# Altium PCB LED_Driver_brd.PcbDoc
Units mil, origin at the board's own origin, x right, y up, seen from the top; angles counter-clockwise.
Board outline 1575 x 3347 mil, 2 copper layers (Top Layer, Bottom Layer), stack 65.792 mil thick; 16 components, 17 nets, 165 pads, 1255 vias.
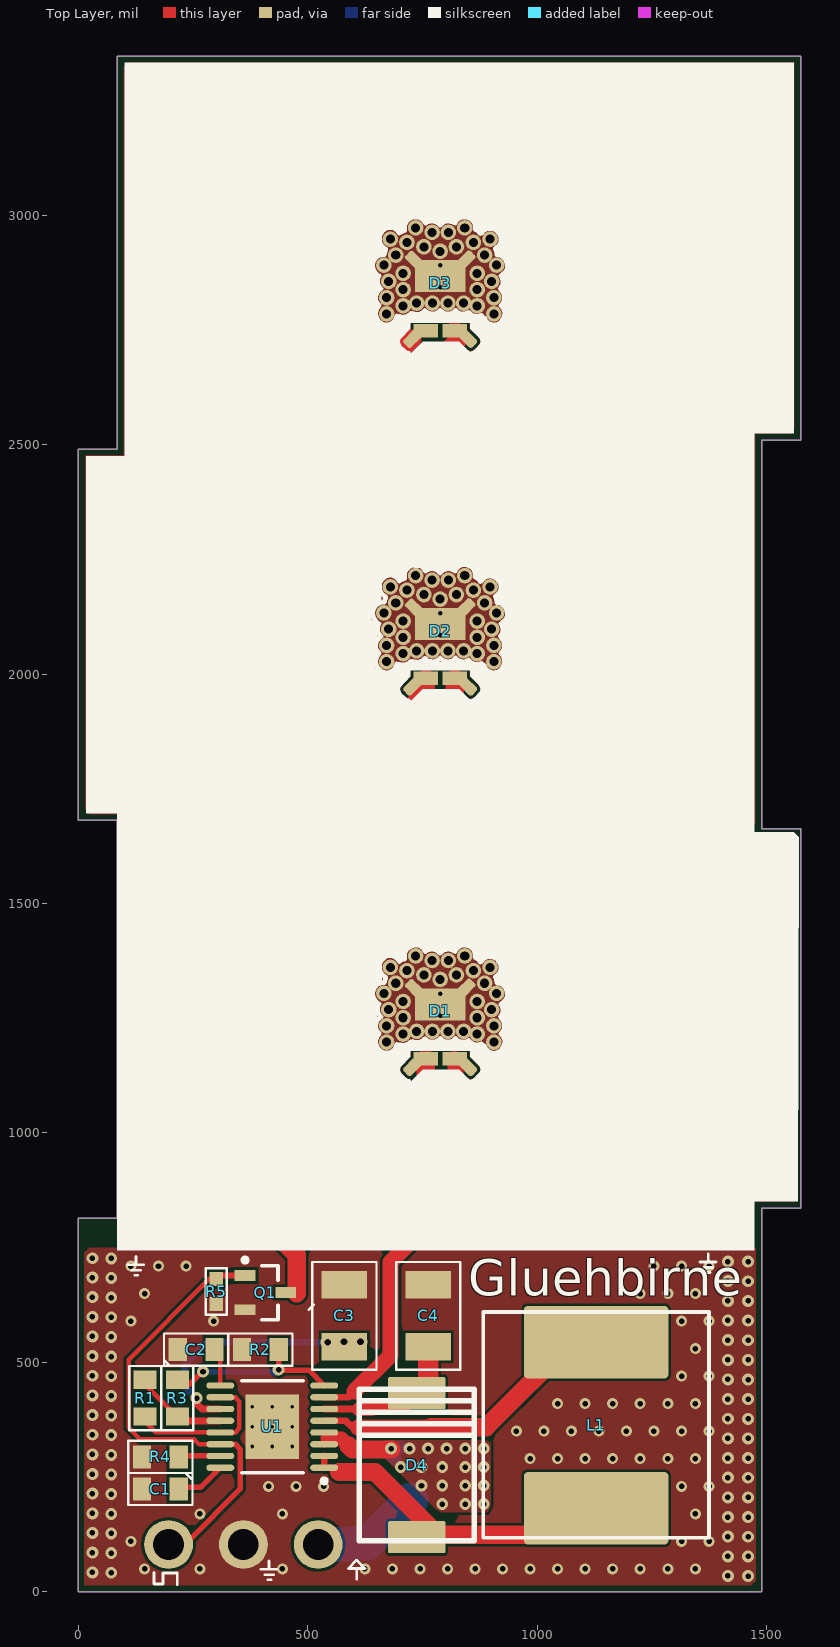
[diagram p0: Top Layer view]
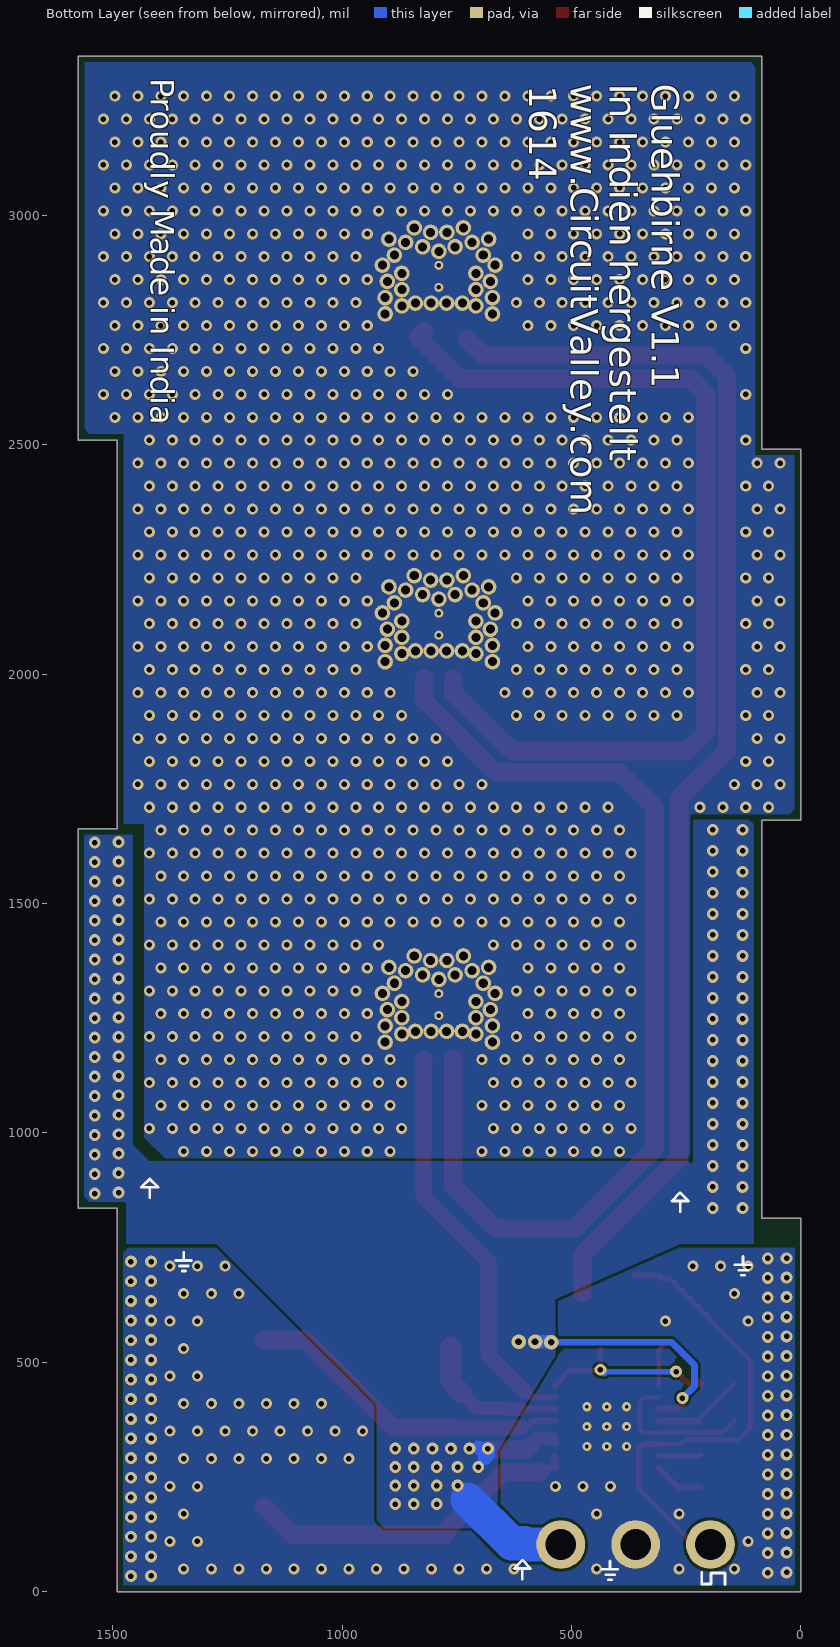
[diagram p1: Bottom Layer view, seen from below]

## Layer stack, top to bottom
Top Solder: solder mask 0.4, Solder Resist, Dk 3.5
Top Layer: signal copper 1.4
Dielectric 1: dielectric 62.9921, FR-4, Dk 4.8
Bottom Layer: signal copper 1.4
Bottom Solder: solder mask 0.4, Solder Resist, Dk 3.5

## Board outline
0,814 85,814 85,1682 0,1682 0,2490 85,2490 85,3347 1575,3347 1575,2510 1490,2510 1490,1663 1575,1663 1575,836 1490,836 1490,0 0,0

## Design rules (kind name [scope] priority, off if disabled: settings)
Clearance [All] p1: gap=6
HoleSize [All] p1: absolutevalues=TRUE maxlimit=500 minlimit=12 maxpercent=80.000 minpercent=20.000
PlaneClearance [All] p1: clearance=0
PlaneConnect [All] p1: planeconnectstyle=Relief reliefexpansion=20 reliefentries=4 reliefconductorwidth=10 reliefairgap=0
PolygonConnect [All] p1: connectstyle=Direct reliefconductorwidth=10 reliefentries=2 polygonreliefangle="90 Angle" airgapwidth=0
RoutingVias [All] p1: holewidth=20 width=50 viastyle="Through Hole" minholewidth=12 minwidth=22 maxholewidth=500 maxwidth=5000
SolderMaskExpansion [All] p1: expansion=4
Width [All] p1: maxlimit=500 minlimit=6 preferedwidth=15
27 further rules are at their usual default settings.

## Components (designator, comment, footprint, x,y, rotation, side; value= is the part's Value field where it differs from the comment)
C1 "1uf" 0805C-TBD 149,224 r0 top
C2 "0.1uf" 0805C-TBD 227,528 r0 top
C3 "22uF" 1210C-GENERIC 580,534 r90 top
C4 "10uf" 1210C-GENERIC 763,534 r90 top
D1 "LUXEON LED" LUXEON 789,1259.84 r270 top
D2 "LUXEON LED" LUXEON 789,2089 r270 top
D3 "LUXEON LED" LUXEON 789,2847 r270 top
D4 "SK3200" SK3200 738,276 r270 top
L1 "10uh" SRR1280A 1129,363 r270 top
Q1 "IRLML6344" SOT-23_N 408,652 r0 top
R1 "46.4K" 0805R-TBD 146,452 r270 top
R2 "26.1K" 0805R-TBD 427,528 r180 top
R3 "34.8K" 0805R-TBD 216,452 r270 top
R4 "68K" 0805R-TBD 209,294 r180 top
R5 "10K" 0603R-10K 301,682 r270 top
U1 "LT3478EFE#TRPBF" LT-FE-16-EPV-BC_N 423,360 r180 top

## Footprints (in the part's own frame and the unit in brackets; to place one, negate y for a bottom-side part, rotate by r counter-clockwise, add the part's x,y. Pads: shape width x height; smd on the part's side, far side on the other; paste and mask are expansions set on the pad)
0603R-10K [mil] "RESISTOR 0603"
  rect 30x30 smd: 1(0,0) 2(55,0)
  silkscreen extent -23,-23 78,23, body extent -4,-15 59,15, height 20
0805C-TBD [mil] "CAPACITOR 0805"
  rect 40x50 smd: 1(-10,0) 2(70,0)
  silkscreen extent -40,-35 100,35, body extent -11,-25 70,25, height 26
0805R-TBD [mil] "RESISTOR 0805 VALUE TO BE DETERMINED"
  rect 40x50 smd: 1(-10,0) 2(70,0)
  silkscreen extent -40,-35 100,35, body extent -11,-25 70,25, height 27
1210C-GENERIC [mil]
  rect 60x100 smd: 1(0,0) 2(135,0)
  silkscreen extent -50,-70 185,70, body extent -10,-50 145,50, height 46
LT-FE-16-EPV-BC_N [mm] "SOP, 16-Leads, Body 5.1x4.5mm, Pitch 0.65mm, Thermal Pad 3.58x2.94mm, IPC Medium Density"
  oval 1.55x0.35 smd: 1(-2.875,2.275) 2(-2.875,1.625) 3(-2.875,0.975) 4(-2.875,0.325) 5(-2.875,-0.325) 6(-2.875,-0.975) 7(-2.875,-1.625) 8(-2.875,-2.275) 9(2.875,-2.275) 10(2.875,-1.625) 11(2.875,-0.975) 12(2.875,-0.325) 13(2.875,0.325) 14(2.875,0.975) 15(2.875,1.625) 16(2.875,2.275)
  rect 2.94x3.58 smd: 17(0,0)
  silkscreen extent -3,-2.55 1.7,3.12, body extent -2.25,-2.55 2.25,2.55, height 1.1
LUXEON [mm]
  round 0.864 hole 0.5: 0(-3.2,1.36) 0(-3.2,-1.36) 0(-2.95,-0.45) 0(-2.95,0.45) 0(-2.57,2.76) 0(-2.57,-2.76) 0(-2.39,1.84) 0(-2.39,-1.84) 0(-2.15,-0.9) 0(-2.15,0.9) 0(-1.9,0) 0(-1.69,2.46) 0(-1.69,-2.46) 0(-1.13,3.12) 0(-1.13,-3.12) 0(-0.68,2.05) 0(-0.68,-2.05) 0(-0.23,2.85) 0(-0.23,-2.85) 0(0.22,2.05) 0(0.22,-2.05) 0(0.67,2.97) 0(0.67,-2.97) 0(0.97,1.3) 0(0.97,-0.43) 0(0.97,0.43) 0(0.97,-1.3) 0(1.12,2.05) 0(1.12,-2.05) 0(1.57,2.97) 0(1.57,-2.97)
  rrect50% 0.6x1 smd rot 45: 0(-1.448,1.448) 2(2.946,-1.549)
  rrect50% 0.6x1 smd rot 135: 0(-1.422,-1.448) 1(2.946,1.549)
  round 0.5 hole 0.25: 0(-1.12,0) 0(0.1,0)
  rect 1.77x2.8 smd: 0(-0.525,0)
  rect 0.75x1.35 smd: 1(2.495,0.8) 2(2.495,-0.8)
  silkscreen extent -3.8,-3.73 2.17,3.72, body extent -1.52,-1.53 2.97,1.52, height 1.92
SK3200 [mil]
  rrect10% 70x125 smd: 1(156.99,0) 2(-156.99,0)
  silkscreen extent -165,-125 165,125, body extent -165,-125 165,125, height 103
SOT-23_N [mm] "SOT23, 3-Leads, Body 2.9x1.3mm, Pitch 0.95mm, Lead Span 2.3mm, IPC Medium Density"
  rect 1.15x0.6 smd: 1(-1.125,0.95) 2(-1.125,-0.95) 3(1.125,0)
  silkscreen extent -1.25,-1.5 0.7,1.92, body extent -0.7,-1.5 0.7,1.5, height 1.11
SRR1280A [mm]
  rrect10% 4x8 smd: 1(-4.6,0) 2(4.6,0)
  silkscreen extent -6.27,-6.25 6.22,6.25, body extent -6.25,-6.3 6.25,6.2, height 7.51

## Part data
C1 C2: library part 0805C-TBD, "CAPACITOR 0805 CERAMIC VALUE TO BE DETERMINED"
C3 C4: library part 1210C-22UF-6V3-X5R-PAN, "GENERIC CAPACITOR NON POLARISED 1210"
D1 D2 D3: library part LMX-PWC2
L1: library part inductor_smd
Q1: library part IRLML2402, "HEXFET Power MOSFET"
R1 R2 R3 R4: library part 0805R-TBD, "RESISTOR 0805 VALUE TO BE DETERMINED"
R5: library part 0603R-10K, "GENERIC RESISTOR 0603"
U1: "4.5 A Monolithic LED Driver with True Color PWM Dimming, 2.8 to 36 V Vin, 42 V Vout MAX, 16-pin SOP (FE-16-EPV-BC), -40 to 125 degC, Pb-Free, Tape and Reel"

## Free pads (board coordinates)
  round 106.3 hole 66.93: 0(197,103) 1(360,103) 2(523,103)

## Via types
v1: diameter 24, hole 12, Top Layer to Bottom Layer, tented both sides, 1078 vias
v2: diameter 26, hole 12, Top Layer to Bottom Layer, 144 vias
v3: diameter 26, hole 12, Top Layer to Bottom Layer, tented both sides, 21 vias
v4: diameter 19.68, hole 7.87, Top Layer to Bottom Layer, 9 vias
v5: diameter 32, hole 15, Top Layer to Bottom Layer, tented bottom, 3 vias

## Nets (pads, with @x,y where several pads share a name; then routed paths per layer and width w, separated by ;. In a path a pad name is that pad's centre, name@x,y a point inside that pad or via, vN(x,y) a via of type N, cw(c..) or ccw(c..) an arc to the next point about the centre after c; other vN are vias at no path point)
GND: C1.1 C2.1 C3.2 C4.2 pad.1 Q1.2 R2.2 R4.2 R5.2 U1.17
  other v1: 145,50 265,50 445,50 625,50 685,50 745,50 805,50 865,50 925,50 985,50 1045,50 1105,50 1165,50 1225,50 1285,50 1345,50 115,110 1315,110 1375,110 265,170 445,170 1345,170 415,230 475,230 535,230 1315,230 1375,230 985,290 1045,290 1105,290 1165,290 1225,290 1285,290 1345,290 955,350 1015,350 1075,350 1135,350 1195,350 1255,350 1315,350 1375,350 1045,410 1105,410 1165,410 1225,410 1285,410 1345,410 1315,470 1375,470 1345,530 115,590 295,590 1315,590 1375,590 145,650 1225,650 1285,650 1345,650 115,710 175,710 235,710 1255,710 1315,710 1375,710
  other v2: 1460,34 1416,34.5 72,41.5 31,42.5 1416,77.33 1460,77.17 72,84.33 31,85.33 1416,120.17 1460,120 72,127.17 31,128.17 1416,163 1460,162.83 72,170 31,171 1416,205.83 1460,205.67 72,212.83 31,213.83 1460,248.5 1416,248.67 72,255.67 31,256.67 1460,291.33 1416,291.5 72,298.5 31,299.5 1416,334.33 1460,334.17 72,341.33 31,342.33 1416,377.17 1460,377 72,384.17 31,385.17 1416,420 1460,419.83 72,427 31,428 1416,462.83 1460,462.67 72,469.83 31,470.83 1460,505.5 1416,505.67 72,512.67 31,513.67 1416,548.5 1460,548.33 72,555.5 31,556.5 1416,591.33 1460,591.17 72,598.33 31,599.33 1416,634.17 1460,634 72,641.17 31,642.17 1416,677 1460,676.83 72,684 31,685 1416,719.83 1460,719.66 31,727 72,726.83
  other v4: 379.69,316.69 423,316.69 466.31,316.69 379.69,360 423,360 466.31,360 379.69,403.31 423,403.31 466.31,403.31
L: L1.1 U1.5 | length 719.1
  Top Layer w15: U1.5 582.2,372.8 593,362 606,362 610,358
  Top Layer w35: 610,358 768,358 769,359
  Top Layer w40: 769,359 889,359 1079.1,549.1 L1.1@1170,549.1
NetC1_2: C1.2 U1.16 | length 108.4
  Top Layer w12: C1.2@219,228 267.38,228 U1.16
NetC2_2: C2.2 U1.9 | length 97.2
  Top Layer w10: C2.2@296,541 309.81,527.19 U1.9
NetC4_1: C4.1 D4.2 U1.6 | length 327.8
  Top Layer w15: U1.6 610.61,398.39 611,398
  Top Layer w30: 611,398 640,398 642,400 705.01,400 D4.2
  Top Layer w45: D4.2 763,457.99 C4.1
NetD1_0: D1.0 D2.0 D3.0
  other v1: 395,960 445,960 495,960 545,960 595,960 645,960 695,960 895,960 945,960 995,960 1045,960 1095,960 1145,960 1195,960 1245,960 1295,960 1345,960 370,1010 420,1010 470,1010 520,1010 570,1010 620,1010 670,1010 870,1010 920,1010 970,1010 1020,1010 1070,1010 1120,1010 1170,1010 1220,1010 1270,1010 1320,1010 1370,1010 1420,1010 395,1060 445,1060 495,1060 545,1060 595,1060 645,1060 695,1060 895,1060 945,1060 995,1060 1045,1060 1095,1060 1145,1060 1195,1060 1245,1060 1295,1060 1345,1060 1395,1060 370,1110 420,1110 470,1110 520,1110 570,1110 620,1110 670,1110 870,1110 920,1110 970,1110 1020,1110 1070,1110 1120,1110 1170,1110 1220,1110 1270,1110 1320,1110 1370,1110 1420,1110 395,1160 445,1160 495,1160 545,1160 595,1160 645,1160 695,1160 895,1160 945,1160 995,1160 1045,1160 1095,1160 1145,1160 1195,1160 1245,1160 1295,1160 1345,1160 1395,1160 370,1210 420,1210 470,1210 520,1210 570,1210 620,1210 970,1210 1020,1210 1070,1210 1120,1210 1170,1210 1220,1210 1270,1210 1320,1210 1370,1210 1420,1210 395,1260 445,1260 495,1260 545,1260 595,1260 945,1260 995,1260 1045,1260 1095,1260 1145,1260 1195,1260 1245,1260 1295,1260 1345,1260 1395,1260 370,1310 420,1310 470,1310 520,1310 570,1310 620,1310 970,1310 1020,1310 1070,1310 1120,1310 1170,1310 1220,1310 1270,1310 1320,1310 1370,1310 1420,1310 395,1360 445,1360 495,1360 545,1360 595,1360 945,1360 995,1360 1045,1360 1095,1360 1145,1360 1195,1360 1245,1360 1295,1360 1345,1360 1395,1360 370,1410 420,1410 470,1410 520,1410 570,1410 620,1410 670,1410 920,1410 970,1410 1020,1410 1070,1410 1120,1410 1170,1410 1220,1410 1270,1410 1320,1410 1370,1410 1420,1410 395,1460 445,1460 495,1460 545,1460 595,1460 645,1460 695,1460 745,1460 795,1460 845,1460 895,1460 945,1460 995,1460 1045,1460 1095,1460 1145,1460 1195,1460 1245,1460 1295,1460 1345,1460 1395,1460 370,1510 420,1510 470,1510 520,1510 570,1510 620,1510 670,1510 720,1510 770,1510 820,1510 870,1510 920,1510 970,1510 1020,1510 1070,1510 1120,1510 1170,1510 1220,1510 1270,1510 1320,1510 1370,1510 1420,1510 395,1560 445,1560 495,1560 545,1560 595,1560 645,1560 695,1560 745,1560 795,1560 845,1560 895,1560 945,1560 995,1560 1045,1560 1095,1560 1145,1560 1195,1560 1245,1560 1295,1560 1345,1560 1395,1560 370,1610 420,1610 470,1610 520,1610 570,1610 620,1610 670,1610 720,1610 770,1610 820,1610 870,1610 920,1610 970,1610 1020,1610 1070,1610 1120,1610 1170,1610 1220,1610 1270,1610 1320,1610 1370,1610 1420,1610 395,1660 445,1660 495,1660 545,1660 595,1660 645,1660 695,1660 745,1660 795,1660 845,1660 895,1660 945,1660 995,1660 1045,1660 1095,1660 1145,1660 1195,1660 1245,1660 1295,1660 1345,1660 1395,1660 70,1710 120,1710 170,1710 220,1710 420,1710 470,1710 520,1710 570,1710 620,1710 670,1710 720,1710 770,1710 820,1710 870,1710 920,1710 970,1710 1020,1710 1070,1710 1120,1710 1170,1710 1220,1710 1270,1710 1320,1710 1370,1710 1420,1710 45,1760 95,1760 145,1760 695,1760 745,1760 795,1760 845,1760 895,1760 945,1760 995,1760 1045,1760 1095,1760 1145,1760 1195,1760 1245,1760 1295,1760 1345,1760 1395,1760 1445,1760 70,1810 120,1810 770,1810 820,1810 870,1810 920,1810 970,1810 1020,1810 1070,1810 1120,1810 1170,1810 1220,1810 1270,1810 1320,1810 1370,1810 1420,1810 45,1860 95,1860 795,1860 845,1860 895,1860 945,1860 995,1860 1045,1860 1095,1860 1145,1860 1195,1860 1245,1860 1295,1860 1345,1860 1395,1860 1445,1860 70,1910 120,1910 270,1910 320,1910 370,1910 420,1910 470,1910 520,1910 570,1910 620,1910 870,1910 920,1910 970,1910 1020,1910 1070,1910 1120,1910 1170,1910 1220,1910 1270,1910 1320,1910 1370,1910 1420,1910 45,1960 95,1960 245,1960 295,1960 345,1960 395,1960 445,1960 495,1960 545,1960 595,1960 645,1960 895,1960 945,1960 995,1960 1045,1960 1095,1960 1145,1960 1195,1960 1245,1960 1295,1960 1345,1960 1395,1960 1445,1960 70,2010 120,2010 270,2010 320,2010 370,2010 420,2010 470,2010 520,2010 570,2010 620,2010 970,2010 1020,2010 1070,2010 1120,2010 1170,2010 1220,2010 1270,2010 1320,2010 1370,2010 1420,2010 45,2060 95,2060 245,2060 295,2060 345,2060 395,2060 445,2060 495,2060 545,2060 595,2060 945,2060 995,2060 1045,2060 1095,2060 1145,2060 1195,2060 1245,2060 1295,2060 1345,2060 1395,2060 1445,2060 70,2110 120,2110 270,2110 320,2110 370,2110 420,2110 470,2110 520,2110 570,2110 620,2110 970,2110 1020,2110 1070,2110 1120,2110 1170,2110 1220,2110 1270,2110 1320,2110 1370,2110 1420,2110 45,2160 95,2160 245,2160 295,2160 345,2160 395,2160 445,2160 495,2160 545,2160 595,2160 945,2160 995,2160 1045,2160 1095,2160 1145,2160 1195,2160 1245,2160 1295,2160 1345,2160 1395,2160 1445,2160 70,2210 120,2210 270,2210 320,2210 370,2210 420,2210 470,2210 520,2210 570,2210 620,2210 970,2210 1020,2210 1070,2210 1120,2210 1170,2210 1220,2210 1270,2210 1320,2210 1370,2210 1420,2210 45,2260 95,2260 245,2260 295,2260 345,2260 395,2260 445,2260 495,2260 545,2260 595,2260 645,2260 695,2260 745,2260 795,2260 845,2260 895,2260 945,2260 995,2260 1045,2260 1095,2260 1145,2260 1195,2260 1245,2260 1295,2260 1345,2260 1395,2260 1445,2260 70,2310 120,2310 270,2310 320,2310 370,2310 420,2310 470,2310 520,2310 570,2310 620,2310 670,2310 720,2310 770,2310 820,2310 870,2310 920,2310 970,2310 1020,2310 1070,2310 1120,2310 1170,2310 1220,2310 1270,2310 1320,2310 1370,2310 1420,2310 45,2360 95,2360 245,2360 295,2360 345,2360 395,2360 445,2360 495,2360 545,2360 595,2360 645,2360 695,2360 745,2360 795,2360 845,2360 895,2360 945,2360 995,2360 1045,2360 1095,2360 1145,2360 1195,2360 1245,2360 1295,2360 1345,2360 1395,2360 1445,2360 70,2410 120,2410 270,2410 320,2410 370,2410 420,2410 470,2410 520,2410 570,2410 620,2410 670,2410 720,2410 770,2410 820,2410 870,2410 920,2410 970,2410 1020,2410 1070,2410 1120,2410 1170,2410 1220,2410 1270,2410 1320,2410 1370,2410 1420,2410 45,2460 95,2460 245,2460 295,2460 345,2460 395,2460 445,2460 495,2460 545,2460 595,2460 645,2460 695,2460 745,2460 795,2460 845,2460 895,2460 945,2460 995,2460 1045,2460 1095,2460 1145,2460 1195,2460 1245,2460 1295,2460 1345,2460 1395,2460 1445,2460 120,2510 270,2510 320,2510 370,2510 420,2510 470,2510 520,2510 570,2510 620,2510 670,2510 720,2510 770,2510 820,2510 870,2510 920,2510 970,2510 1020,2510 1070,2510 1120,2510 1170,2510 1220,2510 1270,2510 1320,2510 1370,2510 1420,2510 245,2560 295,2560 345,2560 395,2560 445,2560 495,2560 545,2560 595,2560 645,2560 695,2560 745,2560 795,2560 845,2560 895,2560 945,2560 995,2560 1045,2560 1095,2560 1145,2560 1195,2560 1245,2560 1295,2560 1345,2560 1395,2560 1445,2560 1495,2560 120,2610 770,2610 820,2610 870,2610 920,2610 970,2610 1020,2610 1070,2610 1120,2610 1170,2610 1220,2610 1270,2610 1320,2610 1370,2610 1420,2610 1470,2610 1520,2610 845,2660 895,2660 945,2660 995,2660 1045,2660 1095,2660 1145,2660 1195,2660 1245,2660 1295,2660 1345,2660 1395,2660 1445,2660 1495,2660 120,2710 920,2710 970,2710 1020,2710 1070,2710 1120,2710 1170,2710 1220,2710 1270,2710 1320,2710 1370,2710 1420,2710 1470,2710 1520,2710 145,2760 195,2760 245,2760 295,2760 345,2760 395,2760 445,2760 495,2760 545,2760 595,2760 945,2760 995,2760 1045,2760 1095,2760 1145,2760 1195,2760 1245,2760 1295,2760 1345,2760 1395,2760 1445,2760 1495,2760 120,2810 170,2810 220,2810 270,2810 320,2810 370,2810 420,2810 470,2810 520,2810 570,2810 620,2810 970,2810 1020,2810 1070,2810 1120,2810 1170,2810 1220,2810 1270,2810 1320,2810 1370,2810 1420,2810 1470,2810 1520,2810 145,2860 195,2860 245,2860 295,2860 345,2860 395,2860 445,2860 495,2860 545,2860 595,2860 945,2860 995,2860 1045,2860 1095,2860 1145,2860 1195,2860 1245,2860 1295,2860 1345,2860 1395,2860 1445,2860 1495,2860 120,2910 170,2910 220,2910 270,2910 320,2910 370,2910 420,2910 470,2910 520,2910 570,2910 620,2910 970,2910 1020,2910 1070,2910 1120,2910 1170,2910 1220,2910 1270,2910 1320,2910 1370,2910 1420,2910 1470,2910 1520,2910 145,2960 195,2960 245,2960 295,2960 345,2960 395,2960 445,2960 495,2960 545,2960 595,2960 945,2960 995,2960 1045,2960 1095,2960 1145,2960 1195,2960 1245,2960 1295,2960 1345,2960 1395,2960 1445,2960 1495,2960 120,3010 170,3010 220,3010 270,3010 320,3010 370,3010 420,3010 470,3010 520,3010 570,3010 620,3010 670,3010 720,3010 770,3010 820,3010 870,3010 920,3010 970,3010 1020,3010 1070,3010 1120,3010 1170,3010 1220,3010 1270,3010 1320,3010 1370,3010 1420,3010 1470,3010 1520,3010 145,3060 195,3060 245,3060 295,3060 345,3060 395,3060 445,3060 495,3060 545,3060 595,3060 645,3060 695,3060 745,3060 795,3060 845,3060 895,3060 945,3060 995,3060 1045,3060 1095,3060 1145,3060 1195,3060 1245,3060 1295,3060 1345,3060 1395,3060 1445,3060 1495,3060 120,3110 170,3110 220,3110 270,3110 320,3110 370,3110 420,3110 470,3110 520,3110 570,3110 620,3110 670,3110 720,3110 770,3110 820,3110 870,3110 920,3110 970,3110 1020,3110 1070,3110 1120,3110 1170,3110 1220,3110 1270,3110 1320,3110 1370,3110 1420,3110 1470,3110 1520,3110 145,3160 195,3160 245,3160 295,3160 345,3160 395,3160 445,3160 495,3160 545,3160 595,3160 645,3160 695,3160 745,3160 795,3160 845,3160 895,3160 945,3160 995,3160 1045,3160 1095,3160 1145,3160 1195,3160 1245,3160 1295,3160 1345,3160 1395,3160 1445,3160 1495,3160 120,3210 170,3210 220,3210 270,3210 320,3210 370,3210 420,3210 470,3210 520,3210 570,3210 620,3210 670,3210 720,3210 770,3210 820,3210 870,3210 920,3210 970,3210 1020,3210 1070,3210 1120,3210 1170,3210 1220,3210 1270,3210 1320,3210 1370,3210 1420,3210 1470,3210 1520,3210 145,3260 195,3260 245,3260 295,3260 345,3260 395,3260 445,3260 495,3260 545,3260 595,3260 645,3260 695,3260 745,3260 795,3260 845,3260 895,3260 945,3260 995,3260 1045,3260 1095,3260 1145,3260 1195,3260 1245,3260 1295,3260 1345,3260 1395,3260 1445,3260 1495,3260
NetD1_1: D1.1 U1.7 | length 888.4
  Top Layer w15: U1.7 588.98,423.98 602,437
  Top Layer w35: 602,437 681,516 681,719 822,860 822,1156 823,1157 823,1159.11 D1.1@820.5,1161.61
NetD1_2: D1.2 D2.1 | length 2217.5
  Top Layer w40: D1.2@757.5,1161.61 757.5,884.5 664,791 493,791 319,965 319,1710 395,1786 664,1786 820.5,1942.5 D2.1@820.5,1990.77
NetD2_2: D2.2 D3.1 | length 2086
  Top Layer w40: D2.2@757.5,1990.77 757.5,1960.5 629,1832 249,1832 207,1874 207,2611 240,2644 742.73,2644 834,2735.27 D3.1@820.5,2748.77
NetD3_2: D3.2 Q1.3 | length 2730.1
  Top Layer w40: 476.29,651 476.29,733.71 265,945 265,1730 161,1834 161,2650 206,2695 692,2695 D3.2@728,2731
NetR1_1: R1.1 R3.2 U1.12 | length 198.8
  Top Layer w10: R1.1@145,452 223.29,373.71 cw(c221.59,372) R3.2@224,372
  Top Layer w15: R3.2@224,372 309.02,372 U1.12
NetR1_2: R1.2 U1.10 U1.13 | length 324.8
  Top Layer w10: R1.2@145,372 169,348 309.02,348 U1.13 310.02,347 342,347 351.32,356.32 351.32,414.68 343,423 343,423.98 U1.10
NetR2_1: R2.1 R3.1 U1.8 | length 407.2
  Top Layer w12: R3.1@224,460 216,452 243,452 271,480 v3(272,480) ; R2.1 v3(437,484) 438,483 502.76,483 U1.8
  Bottom Layer w12: v3(272,480) 423,480 428,475 v3(437,484)
NetR4_1: R4.1 U1.15 | length 91.6
  Top Layer w12: R4.1@219,298 220.98,296.02 U1.15
PWM: pad.0 Q1.1 R5.1 U1.14 | length 1033.7
  Top Layer w10: R5.1 286,682 110,506 110,357.44 135.44,332 253,332 263.39,321.61 U1.14
  Top Layer w12: pad.0 204,110 239,110 353.13,224.13 353.13,310.87 342.39,321.61 U1.14 ; R5.1 308.4,689.4 Q1.1
SW: D4.1 L1.2 U1.1 U1.2 | length 752
  Top Layer w15: U1.2 U1.1 559.81,270.43 569.1,261.14
  Top Layer w40: 569.1,261.14 646.86,261.14 774,134 774,124.01 1107.11,124.01 L1.2@1170,186.9
VIN: C3.1 pad.2 U1.3 U1.4 U1.11 | length 965.7
  Top Layer w15: v3(258,422) 258,410 269.61,398.39 U1.11 ; U1.3 543,328.43 543,334
  Top Layer w30: 543,334 574,334 590,318
  Top Layer w40: 590,318 598,310 v3@682,310
  Bottom Layer w15: v3(258,422) 232,448 232,494 282,544 v5(544,544)
  Bottom Layer w30: v5(544,544) 545,545 v5(579,545) ; v3(682,312) 682,298.21 688.36,291.85 ; v3@688.36,312 699.81,312 702.81,315
  Bottom Layer w75: pad.2 599.51,103 602.01,105.5 630.5,105.5 726,201
  other v2: 127,836.5 192,836.5 1539,868 1487,870 127,882.31 192,882.31 1539,910.5 1487,912.44 127,928.11 192,928.11 1539,953 1487,954.89 127,973.92 192,973.92 1539,995.5 1487,997.33 127,1019.72 192,1019.72 1539,1038 1487,1039.78 127,1065.53 192,1065.53 1539,1080.5 1487,1082.22 127,1111.33 192,1111.33 1539,1123 1487,1124.67 127,1157.14 192,1157.14 1539,1165.5 1487,1167.11 127,1202.94 192,1202.94 1539,1208 1487,1209.55 127,1248.75 192,1248.75 1539,1250.5 1487,1252 1539,1293 1487,1294.44 127,1294.56 192,1294.56 1539,1335.5 1487,1336.89 127,1340.36 192,1340.36 1539,1378 1487,1379.33 127,1386.17 192,1386.17 1539,1420.5 1487,1421.78 127,1431.97 192,1431.97 1539,1463 1487,1464.22 127,1477.78 192,1477.78 1539,1505.5 1487,1506.66 127,1523.58 192,1523.58 1539,1548 1487,1549.11 127,1569.39 192,1569.39 1539,1590.5 1487,1591.55 127,1615.19 192,1615.19 1539,1633 1487,1634 127,1661 192,1661
  other v3: 793.5,191 843.6,191 884,191 748.25,231.33 793.5,231.33 843.6,231.33 884,231.33 703,271.67 748.25,271.67 793.5,271.67 843.6,271.67 884,271.67 722.4,312 762.8,312 803.2,312 843.6,312 884,312
  other v5: 615,545

## Polygon pours and split planes (outlines as drawn)
NetD1_0 on Top Layer "Top Layer-No Net" (solid, remove dead copper, pour order 36): 99,3334 1561,3334 1561,2524 1476,2524 1476,1674 1450,1674 1450,977.15 1323.42,850.58 1230.85,758 1032.42,758 415,758 286,887 241,932 241,1695 15,1695 15,2477 99,2477
GND on Top Layer "Top Layer-No Net" (solid, remove dead copper, pour order 32): 13,750 13,14 1477,14 1477,750
VIN on Top Layer "Top Layer-No Net" (solid, pour order 33): 668,330 884.51,330 cw(c884.51,309.51) 899,324 899,191.42 cw(c873.1,191.42) 891.41,173.1 795.65,173.1 cw(c795.65,196.65) 779,180 668,291 668,330
VIN on Top Layer "Top Layer-No Net" (solid, pour order 38): 103,1683 235,1683 235,938 415,758 103,758
VIN on Top Layer "Top Layer-No Net" (solid, pour order 40): 1562,1650 1456,1650 1456,974 1343,861 1326,844 1241,759 1470,759 1470,844 1470,850 1562,850
VIN on Bottom Layer "Top Layer-No Net" (solid, pour order 34): 663,330 891,330 898,323 898,179 893,174 785,174 776,183 663,296 663,326
VIN on Bottom Layer "Top Layer-No Net" (solid, pour order 39): 1562,1650 1456,1650 1456,974 1343,861 1326,844 1133,844 1123,844 1038,759 1470,759 1470,844 1469,845 1474,850 1562,850
VIN on Bottom Layer "Top Layer-No Net" (solid, pour order 37): 102.86,1683.14 234.86,1683.14 234.86,938.14 414.86,758.14 102.86,758.14
VIN on Bottom Layer "Top Layer-No Net" (solid, pour order 41): 234.86,938.14 1418.86,938.14 1436,921 924,409 924,208 924,156 907,139 717,139 661,195 661,306.59 535.67,514.85 535.67,637.33 238.87,768.62
GND on Bottom Layer "Top Layer-No Net" (solid, pour order 42): 13,750 1477,750 1477,14 13,14
NetD1_0 on Bottom Layer "Top Layer-No Net" (solid, pour order 35): 99,3334 1561,3334 1561,2524 1476,2524 1476,1674 1466,1674 1431,1674 1431,990 1323,882 1084,882 1065,882 1005,822 941,758 415,758 286,887 241,932 241,1695 14,1695 14,2477 99,2477
no net on Bottom Solder "Top Layer-No Net" (solid): 668.5,91 668.5,15 1163.5,15 1163.5,91 668.5,91
no net on Bottom Solder "Top Layer-No Net" (solid, pour order 17): 1562,1649 1458,1649 1458,973 1458,850 1562,850
no net on Bottom Solder "Top Layer-No Net" (solid, pour order 15): 103,1681 229,1681 229,936 229,814 103,814
no net on Bottom Solder "Top Layer-No Net" (solid): 1477.03,740.31 1378.51,740.31 1378.51,14 1476.04,14
no net on Bottom Solder "Top Layer-No Net" (solid): 94,749 13,749 13,19 93,19
no net on Bottom Solder "Top Layer-No Net" (solid, pour order 17): 204,3320 99,3320 99,2791 204,2791
no net on Bottom Solder "Top Layer-No Net" (solid, pour order 17): 1561,3318 1453,3318 1453,2789 1561,2789
no net on Bottom Paste "Top Layer-No Net" (solid): 668.5,91 668.5,15 1163.5,15 1163.5,91 668.5,91
no net on Bottom Paste "Top Layer-No Net" (solid, pour order 17): 1562,1647 1459,1647 1459,971 1459,850 1562,850
no net on Bottom Paste "Top Layer-No Net" (solid, pour order 15): 103,1683 231,1683 231,945 231,815 103,815
no net on Bottom Paste "Top Layer-No Net" (solid): 1477.04,744 1379.5,744 1379.5,15 1379.5,14 1476.04,14
no net on Bottom Paste "Top Layer-No Net" (solid): 93.61,749 13,749 13,19 92.61,19
no net on Bottom Paste "Top Layer-No Net" (solid, pour order 17): 204,3320 99,3320 99,2792 204,2792
no net on Bottom Paste "Top Layer-No Net" (solid, pour order 17): 1561,3318 1453,3318 1453,2789 1561,2789
no net on Top Overlay "Top Layer-No Net" (solid): 101,3333 1560,3333 1560,2525 1474,2525 1474,1655 1570.03,1655 1568.03,851.02 1474,851.02 1474,744 85,744 85,1697 18,1697 17,1697 17,2475 102,2475 101,2475 101,3329

## Keep-outs
Keep-Out Layer:
  the board outline again, w3

## Silkscreen, mask and mechanical layers (free items; w line width, h text height)
Top Overlay:
  drawing of 41 lines, arcs and shapes, not listed
  text "Gluehbirne" at 850,645 h78.74
Bottom Overlay:
  lines w6: 109,713 144,713 126,713 126,731 ; 116,701 135,701 ; 122,690 129,690 ; 165,16 165,41 196,41 196,17 216,17 216,42 ; 263,829 263,852 ; 399,49 434,49 416,49 416,67 ; 406,37 425,37 ; 412,26 419,26 ; 607,28 607,51 ; 1328,722 1363,722 1345,722 1345,740 ; 1335,710 1354,710 ; 1341,699 1348,699 ; 1419,859 1419,882 ; 245,852 263,870 281,852 245,852 ; 589,51 625,51 607,69 589,51 ; 1401,882 1419,900 1437,882 1401,882
  text "Proudly Made in India" at 1417,3299 h51.18 r90
  text "Gluehbirne V1.1" at 325,3287 h60 r90
  text "In Indien hergestellt" at 416,3287 h60 r90
  text "www.CircuitValley.com" at 501,3287 h60 r90
  text "1614" at 592,3284 h60 r90